# EAGLE board Easy Digi (EAGLE 6.5.0)

Size 100 x 80 mm. Coordinates in mm from the lower left corner, seen from the top.
Outline: 0,0 100,0 100,80 0,80 0,0
Copper layers (1*16): Top 0.035mm / dielectric 1.5mm / Bottom 0.035mm
Design rules "default": minimum track width 10mil, minimum drill 24mil, track to track 8mil, track to pad 8mil, pad to pad 8mil, via to via 8mil, smd to smd 8mil, copper to edge 40mil, drill to drill 8mil, minimum pad ring 10mil, minimum via ring 8mil, stop-mask expansion 4mil, vias tented up to drill 0mil, thermal gap 10mil

## Footprints (pad centres in the part's own frame; a part is rotated, then mirrored left to right if it is on the bottom)
DO35-10 = drill 0.813 long: A 5.08,0; C -5.08,0
DO41-10 = drill 1.118: A 5.08,0; C -5.08,0
DIL06B = drill 0.813 octagon: 1 -2.54,-5.08; 2 0,-5.08; 3 2.54,-5.08; 4 2.54,5.08; 5 0,5.08; 6 -2.54,5.08
0204/7 = drill 0.813 octagon: 1 -3.81,0; 2 3.81,0
42TM = drill 0.7 pad 1.3: 1 -3.556,-6.35; 2 0,-6.35; 3 3.556,-6.35; 4 3.556,6.35; 5 0,6.35; 6 -3.556,6.35 | hole 1.9: -9.982,0; 9.982,0

## Placement (x,y rotation side)
D1  1N4148DO35-10  [DO35-10]  -38.1,39.37 0 top  (outside the outline)
D2  1N4148DO35-10  [DO35-10]  -25.4,46.99 0 top  (outside the outline)
D3  1N4004  [DO41-10]  -19.05,39.37 0 top  (outside the outline)
OK1  CNF17GF  [DIL06B]  -41.91,24.13 0 top  (outside the outline)
R1  [0204/7]  -38.1,44.45 0 top  (outside the outline)
R2  [0204/7]  -17.78,52.07 0 top  (outside the outline)
R3  [0204/7]  -27.94,52.07 0 top  (outside the outline)
TR1  42TM016  [42TM]  -24.13,10.16 0 top  (outside the outline)
TR2  42TM016  [42TM]  -24.13,27.94 0 top  (outside the outline)

## Library data of the parts
D1-D3 = diode
OK1 = optocoupler; OC_FARNELL: unknown; OC_NEWARK: unknown
R1-R3 = resistor
TR1 TR2 = trafo-xicon; OC_FARNELL: unknown; OC_NEWARK: unknown